# Altium PCB PCB1.PcbDoc
Units mm, origin at the board's own origin, x right, y up, seen from the top; angles counter-clockwise.
Board outline 105.02 x 130.7 mm, 2 copper layers (Top Layer, Bottom Layer); 102 components, 86 nets, 363 pads, 47 vias.
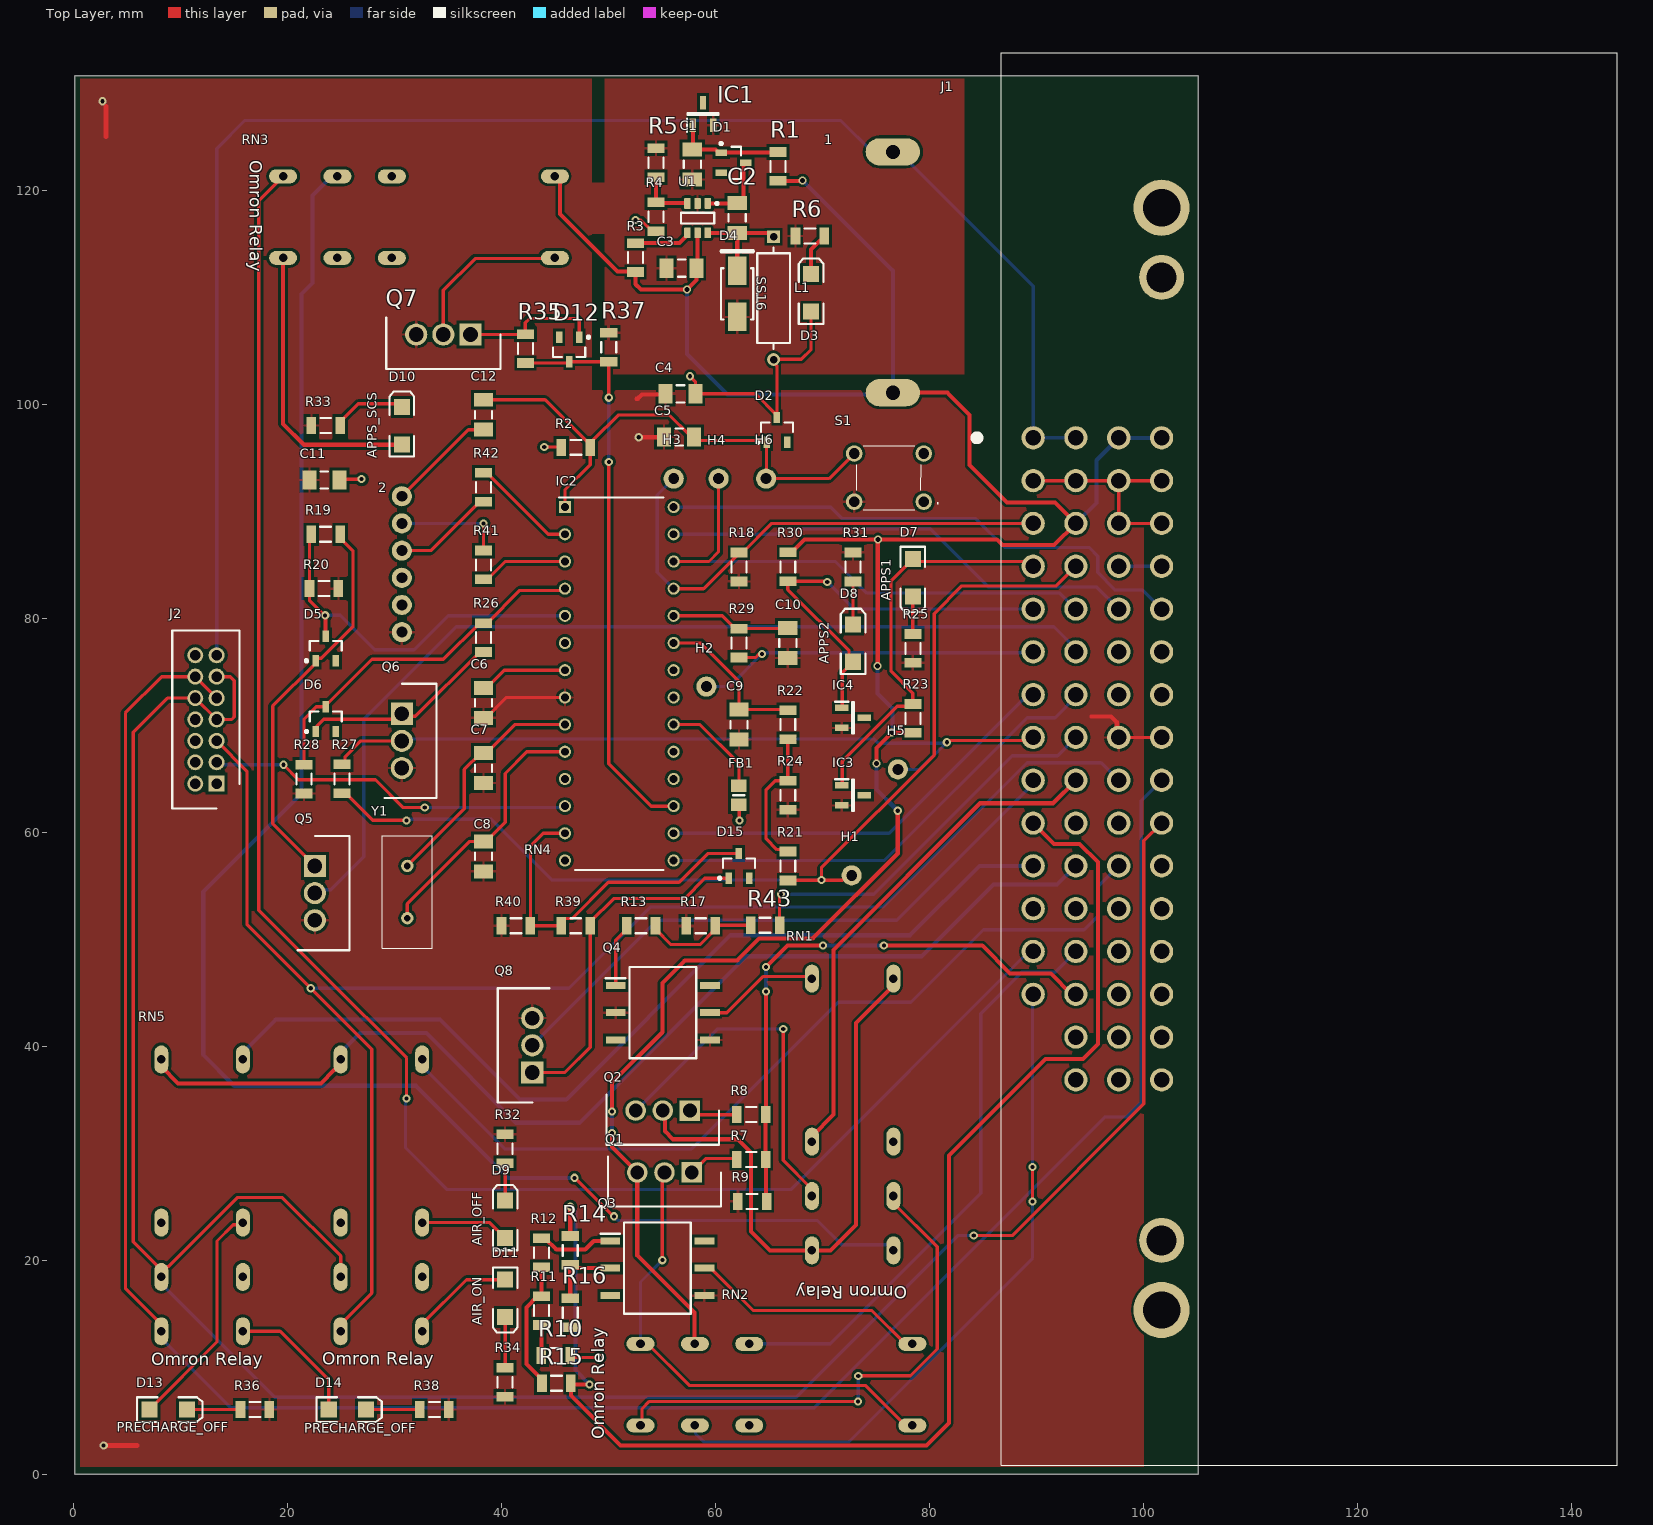
[diagram p0: Top Layer view]
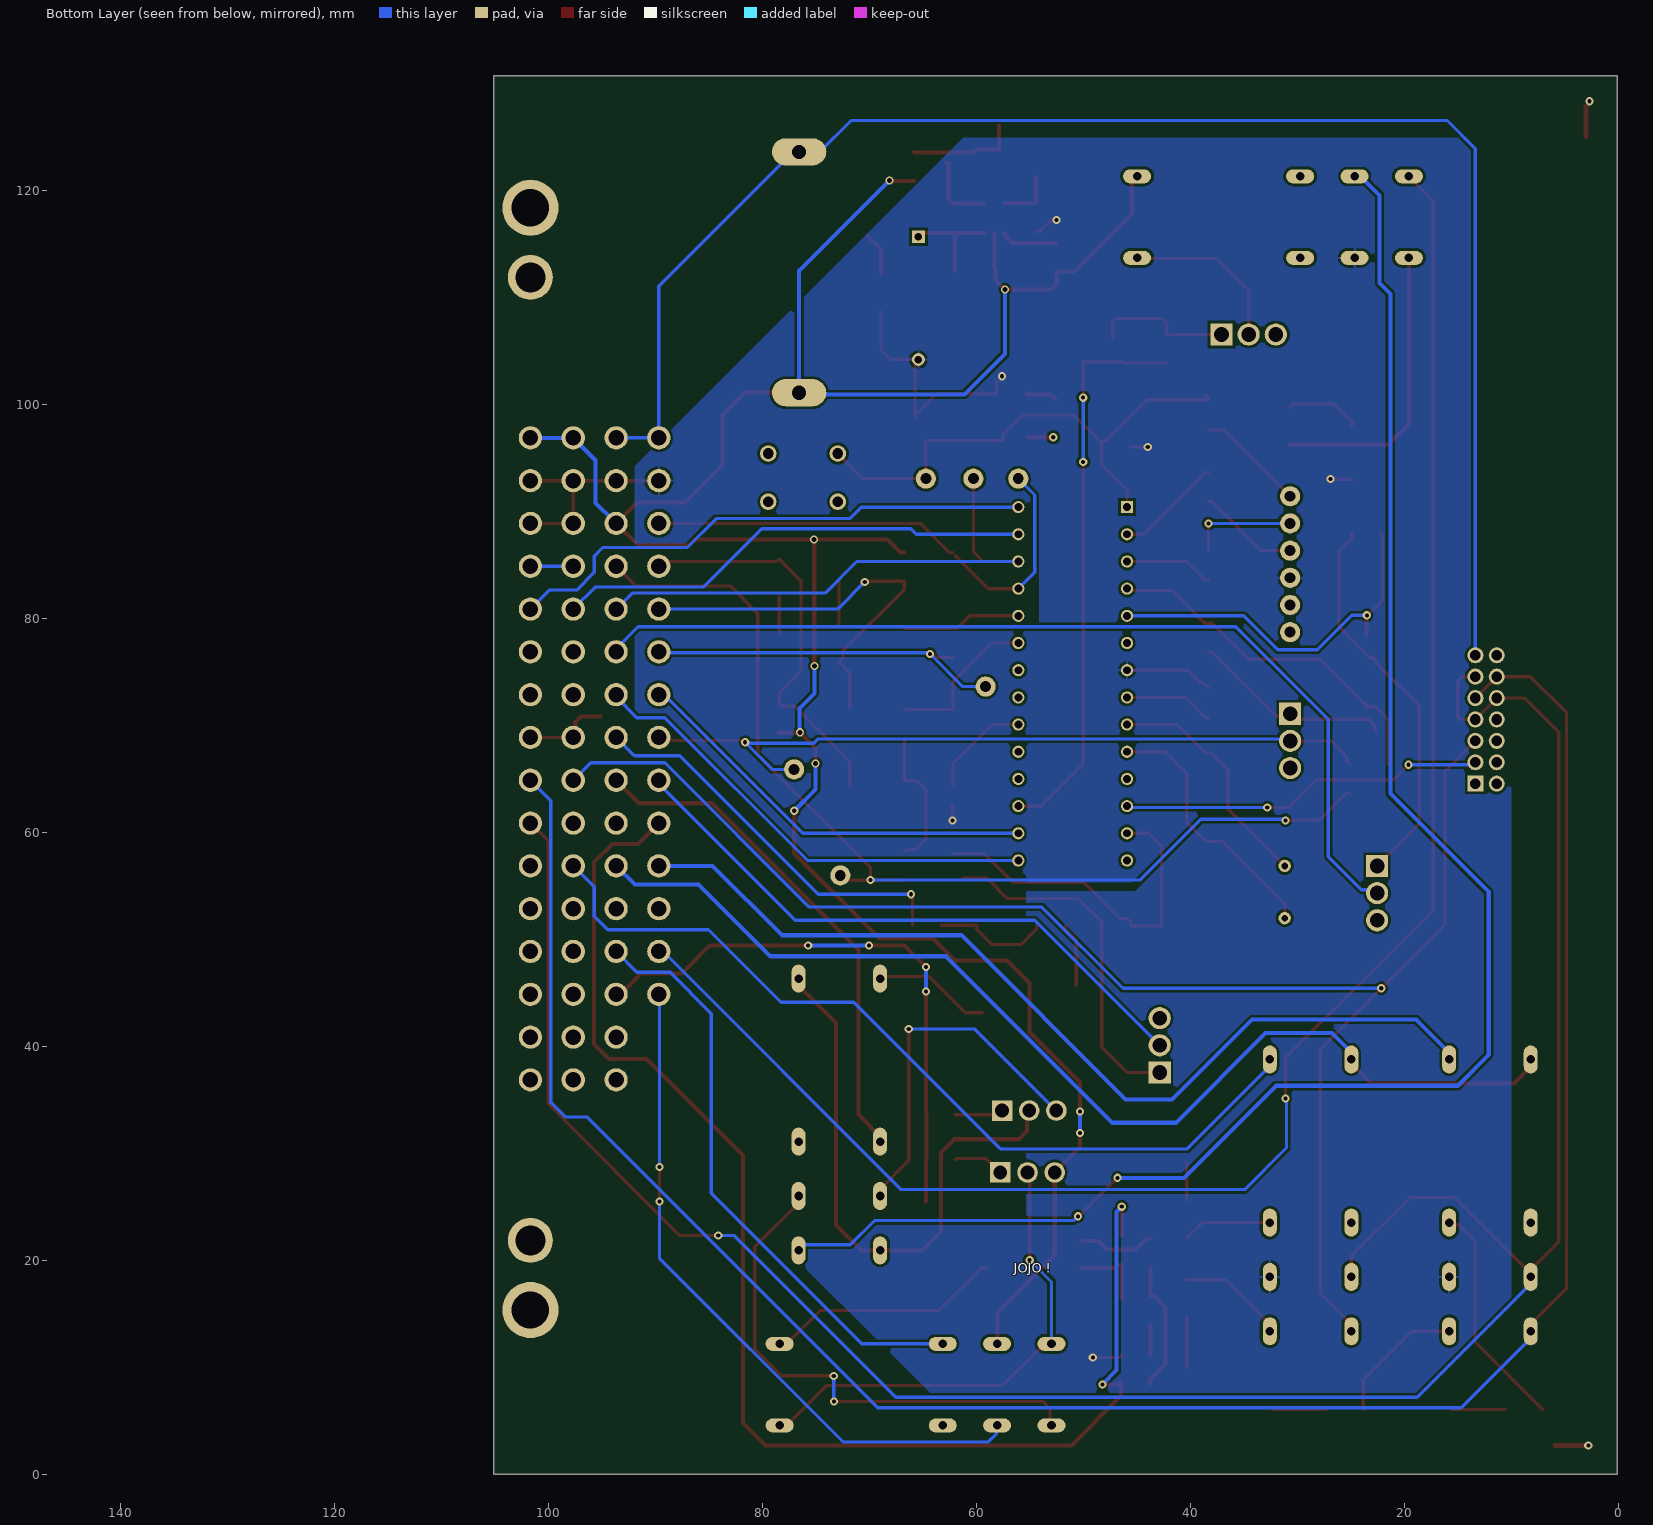
[diagram p1: Bottom Layer view, seen from below]

## Layer stack, top to bottom
Top Solder: solder mask 0.0102, Solder Resist, Dk 3.5
Top Layer: signal copper 0.0356
Dielectric 1: dielectric 0.32, FR-4, Dk 4.8
Bottom Layer: signal copper 0.0356
Bottom Solder: solder mask 0.0102, Solder Resist, Dk 3.5

## Board outline
0.078,0 0.078,130.7 105.1,130.7 105.1,0

## Design rules (kind name [scope] priority, off if disabled: settings)
Clearance [All] p1: gap=0.254 ignorepadtopadclearanceinfootprint=FALSE
Height [All] p1: minheight=0 maxheight=127 prefheight=36.777
HoleSize [All] p1: absolutevalues=TRUE maxlimit=3.81 minlimit=0.025 maxpercent=80.000 minpercent=20.000
MinimumSolderMaskSliver [All] p1: minsoldermaskwidth=0.025
PlaneClearance PlaneClearance_1 [All] p1: clearance=0.508
PlaneClearance [All] p2: clearance=100
PolygonConnect [All] p1: connectstyle=Relief reliefconductorwidth=0.254 reliefentries=4 polygonreliefangle="90 Angle" airgapwidth=0.254
RoutingVias [All] p1: holewidth=0.381 width=0.762 viastyle="Through Hole" minholewidth=0.381 minwidth=0.762 maxholewidth=0.381 maxwidth=0.762
SilkToSilkClearance [All] p1: silktosilkclearance=0
SilkToSolderMaskClearance [IsPad] p1: minsilkscreentomaskgap=0 clearancetoexposedcopper=TRUE
SolderMaskExpansion [All] p1: expansion=0.102 istentingtop=FALSE
UnRoutedNet [All] p1: checkbadconnections=TRUE
Width [All] p1: maxlimit=0.457 minlimit=0.254 preferedwidth=0.381 bottomlayer_maxwidth=0.457 minimp=50.000000 maximp=50.000000 favimp=50.000000
23 further rules are at their usual default settings.

## Classes and differential pairs
component class Sheet4: 2 C11 C12 H1 H2 H3 H4 H5 H6 J1 J2 R41 R42
component class Sheet3: D9 D10 D11 D12 D13 D14 D15 Q7 Q8 R32 R33 R34 R35 R36 R37 R38 R39 R40 RN3 RN4 RN5
component class Sheet2: C6 C7 C8 C9 C10 D5 D6 D7 D8 FB1 IC2 IC3 IC4 Q5 Q6 R18 R19 R20 R21 R22 R23 R24 R25 R26 R27 R28 R29 R30 R31 Y1
component class Sheet1: 1 C1 C2 C3 C4 C5 D1 D2 D3 D4 IC1 L1 Q1 Q2 Q3 Q4 R1 R2 R3 R4 R5 R6 R7 R8 R9 R10 R11 R12 R13 R14 R15 R16 R17 R43 RN1 RN2 S1 U1

## Components (designator, comment, footprint, x,y, rotation, side; value= is the part's Value field where it differs from the comment)
1 "fuse" fuse 76.542,112.724 r90 top
2 "FTDI_connector" FTDI 30.736,85.013 r270 top
C1 "100nF" KEMT-1206-2_N 57.8,122.4 r90 top
C2 "100nF" KEMT-1206-2_N 62,117.4 r90 top
C3 "100nF" KEMT-1206-2_N 56.8,112.7 r0 top
C4 "100nF" KEMT-1206-2_N 56.695,100.964 r0 top
C5 "100nF" KEMT-1206-2_N 56.568,96.936 r0 top
C6 "10uF" KEMT-1206-2_N 38.28,72.084 r90 top
C7 "22pF" KEMT-1206-2_N 38.28,65.988 r90 top
C8 "22pF" KEMT-1206-2_N 38.28,57.736 r90 top
C9 "10uF" KEMT-1206-2_N 62.156,70.052 r90 top
C10 "0.01uF" KEMT-1206-2_N 66.728,77.672 r90 top
C11 "0.01uF" KEMT-1206-2_N 23.424,92.912 r0 top
C12 "10uF" KEMT-1206-2_N 38.28,99.008 r90 top
D1 "BAT54" INF-SOT23_N 61.65,122.55 r0 top
D2 "BAT54" INF-SOT23_N 65.712,97.586 r90 top
D3 "APPS1" 3.2X1.6X1.1 68.9,110.4 r90 top
D4 "SS16" FAIR-SMA-2_B_V 62,110.3 r90 top
D5 "BAT54" INF-SOT23_N 23.548,77.164 r90 top
D6 "BAT54" INF-SOT23_N 23.548,70.56 r90 top
D7 "APPS1" 3.2X1.6X1.1 78.412,83.768 r270 top
D8 "APPS2" 3.2X1.6X1.1 72.824,77.672 r90 top
D9 "AIR_OFF" 3.2X1.6X1.1 40.312,23.824 r90 top
D10 "APPS_SCS" 3.2X1.6X1.1 30.66,97.992 r90 top
D11 "AIR_ON" 3.2X1.6X1.1 40.312,16.43 r270 top
D12 "BAT54" INF-SOT23_N 46.3,105.1 r270 top
D13 "PRECHARGE_OFF" 3.2X1.6X1.1 8.816,6.044 r0 top
D14 "PRECHARGE_OFF" 3.2X1.6X1.1 25.58,6.044 r0 top
D15 "BAT54" INF-SOT23_N 62.156,56.844 r90 top
FB1 "MPZ2012S221A" BEADC2012X105N 62.156,63.448 r90 top
H1 "Header" Header 72.691,55.958 r0 top
H2 "Header" Header 59.108,73.608 r0 top
H3 "Header" Header 56.06,93.039 r0 top
H4 "Header" Header 60.251,93.039 r0 top
H5 "Header" Header 77.009,65.864 r0 top
H6 "Header" Header 64.69,93.042 r0 top
IC1 "LM4040B82BZT" SOT95P237X112-3N 58.8,127.1 r90 top
IC2 "ATMEGA328-PU" DIP1016W53P254L3468H457Q28N 50.98,73.862 r0 top
IC3 "LM4040B82BZT" SOT95P237X112-3N 72.824,63.448 r0 top
IC4 "LM4040B82BZT" SOT95P237X112-3N 72.824,70.687 r0 top
J1 "1-1418362-3" 114183623 89.652,96.848 r270 top locked
J2 "87831-1420" SHDR14W55P200_2X7_1665X630X640P 13.356,64.528 r90 top
L1 "IR02BH100K" FP-IR02-MFG 65.4,109.9 r270 top value=10uH
Q1 "IRF4905PBF" TO254P469X1042X1967-3P 57.74,28.2 r180 top
Q2 "IRF4905PBF" TO254P469X1042X1967-3P 57.584,33.984 r180 top
Q3 "MCT2ESM" SOT254P916X480-6N 54.536,19.252 r0 top
Q4 "MCT2ESM" SOT254P916X480-6N 55.044,43.128 r0 top
Q5 "IRFZ44n" TO254P483X1016X2223-3P 22.532,56.844 r270 top
Q6 "IRFZ44n" TO254P483X1016X2223-3P 30.66,71.068 r270 top
Q7 "IRFZ44n" TO254P483X1016X2223-3P 37.08,106.5 r180 top
Q8 "IRFZ44n" TO254P483X1016X2223-3P 42.852,37.54 r90 top
R1 "4.7k" R1206 65.8,122.2 r270 top
R2 "4.7k" R1206 46.916,95.96 r180 top
R3 "4.7k" R1206 52.5,113.7 r90 top
R4 "4.7k" R1206 54.4,117.5 r270 top
R5 "4.7k" R1206 54.4,122.543 r270 top
R6 "4.7k" R1206 68.8,115.7 r0 top
R7 "CRCW120647K0FKEA" R1206 63.3,29.4 r180 top
R8 "CRCW120647K0FKEA" R1206 63.3,33.6 r180 top
R9 "CRCW120647K0FKEA" R1206 63.4,25.5 r0 top
R10 "CRCW120647K0FKEA" R1206 45.057,11.1 r0 top
R11 "CRCW120647K0FKEA" R1206 43.7,15.3 r90 top
R12 "CRCW120647K0FKEA" R1206 43.7,20.7 r90 top
R13 "CRCW120647K0FKEA" R1206 53.012,51.256 r180 top
R14 "CRCW120647K0FKEA" R1206 46.4,20.9 r270 top
R15 "CRCW120647K0FKEA" R1206 45.1,8.5 r180 top
R16 "CRCW120647K0FKEA" R1206 46.4,15.1 r90 top
R17 "CRCW120647K0FKEA" R1206 58.6,51.256 r0 top
R18 "CRCW120647K0FKEA" R1206 62.156,84.784 r90 top
R19 "CRCW120647K0FKEA" R1206 23.548,87.832 r0 top
R20 "CRCW120647K0FKEA" R1206 23.374,82.752 r180 top
R21 "CRCW120647K0FKEA" R1206 66.728,56.844 r90 top
R22 "CRCW120647K0FKEA" R1206 66.728,70.052 r90 top
R23 "CRCW120647K0FKEA" R1206 78.412,70.635 r90 top
R24 "CRCW120647K0FKEA" R1206 66.728,63.448 r90 top
R25 "CRCW120647K0FKEA" R1206 78.412,77.164 r270 top
R26 "CRCW120647K0FKEA" R1206 38.28,78.18 r270 top
R27 "CRCW120647K0FKEA" R1206 25.072,64.972 r270 top
R28 "CRCW120647K0FKEA" R1206 21.516,64.972 r90 top
R29 "CRCW120647K0FKEA" R1206 62.156,77.672 r90 top
R30 "CRCW120647K0FKEA" R1206 66.728,84.784 r270 top
R31 "CRCW120647K0FKEA" R1206 72.824,84.784 r90 top
R32 "CRCW120647K0FKEA" R1206 40.312,30.428 r90 top
R33 "CRCW120647K0FKEA" R1206 23.548,97.992 r180 top
R34 "CRCW120647K0FKEA" R1206 40.312,8.584 r270 top
R35 "CRCW120647K0FKEA" R1206 42.2,105.2 r90 top
R36 "CRCW120647K0FKEA" R1206 16.944,6.044 r0 top
R37 "CRCW120647K0FKEA" R1206 50,105.3 r270 top
R38 "CRCW120647K0FKEA" R1206 33.708,6.044 r0 top
R39 "CRCW120647K0FKEA" R1206 46.916,51.256 r0 top
R40 "CRCW120647K0FKEA" R1206 41.328,51.256 r0 top
R41 "CRCW120647K0FKEA" R1206 38.28,84.958 r270 top
R42 "CRCW120647K0FKEA" R1206 38.28,92.23 r90 top
R43 "CRCW120647K0FKEA" R1206 64.6,51.3 r180 top
RN1 "relay_driver" OMRON_12_RELAY 72.663,35.957 r0 top
RN2 "relay_driver" OMRON_12_RELAY 68,8.5 r270 top
RN3 "relay_driver" OMRON_12_RELAY 34.6,117.6 r270 top
RN4 "relay_driver" OMRON_12_RELAY 28.628,28.396 r0 top
RN5 "relay_driver" OMRON_12_RELAY 11.864,28.396 r0 top
S1 "FSM16JH" FSM16JH 79.428,90.88 r0 top
U1 "LM2734YMK/NOPB" DDC0006A_N 58.3,117.375 r270 top
Y1 "ECS-160-18-4X-CKM" ECS160184XCKM 31.168,56.844 r270 top

## Footprints (in the part's own frame and the unit in brackets; to place one, negate y for a bottom-side part, rotate by r counter-clockwise, add the part's x,y. Pads: shape width x height; smd on the part's side, far side on the other; paste and mask are expansions set on the pad)
3.2X1.6X1.1 [mm] "SMT LED; 2 Flat Leads"
  rect 1.5x1.5 smd: 1(-1.75,0) 2(1.75,0)
  silkscreen extent -2.9,-1.15 3.2,1.15
114183623 [mm]
  round 2.175 hole 1.45: 1(0,0) 2(0,4) 3(0,8) 4(0,12) 5(4,0) 6(4,8) 7(4,4) 8(4,12) 9(8,0) 10(8,4) 11(8,8) 12(8,12) 13(12,0) 14(12,4) 15(12,8) 16(12,12) 17(16,0) 18(16,4) 19(16,8) 20(16,12) 21(20,0) 22(20,4) 23(20,8) 24(20,12) 25(24,0) 26(24,4) 27(24,8) 28(24,12) 29(28,0) 30(28,4) 31(28,8) 32(28,12) 33(32,0) 34(32,4) 35(32,8) 36(32,12) 37(36,0) 38(36,4) 39(36,8) 40(36,12) 41(40,0) 42(40,4) 43(40,8) 44(40,12) 45(44,0) 46(44,4) 47(44,8) 48(44,12) 49(48,0) 50(48,4) 51(48,8) 52(48,12) 53(52,0) 54(52,4) 55(52,8) 56(52,12) 57(56,4) 58(56,8) 59(56,12) 60(60,4) 61(60,8) 62(60,12)
  round 4.2 hole 2.8: MH1(75,12) MH2(-15,12)
  round 5.25 hole 3.5: MH3(81.5,12) MH4(-21.5,12)
  silkscreen extent -36,-5.5 96,54.6, body extent -35.38,-1.91 96.62,55.69, height 36.76
BEADC2012X105N [mm]
  rect 1.15x1.45 smd: 1(-0.9,0) 2(0.9,0)
  silkscreen extent 0,-0.53 0,0.53, body extent -1,-0.63 1,0.63, height 1.05
DDC0006A_N [mm] "SOT23, 6-Leads, Body 3.05x1.75mm, Pitch 0.95mm, IPC Medium Density"
  rrect17% 1x0.6 smd: 1(-1.375,0.95) 2(-1.375,0) 3(-1.375,-0.95) 4(1.375,-0.95) 5(1.375,0) 6(1.375,0.95)
  silkscreen extent -1.5,-1.55 0.5,1.93, body extent -1.43,-1.48 1.43,1.49, height 0.9
DIP1016W53P254L3468H457Q28N [mm]
  rect 1.133x1.133 hole 0.733: 1(-5.08,16.51)
  round 1.133 hole 0.733: 2(-5.08,13.97) 3(-5.08,11.43) 4(-5.08,8.89) 5(-5.08,6.35) 6(-5.08,3.81) 7(-5.08,1.27) 8(-5.08,-1.27) 9(-5.08,-3.81) 10(-5.08,-6.35) 11(-5.08,-8.89) 12(-5.08,-11.43) 13(-5.08,-13.97) 14(-5.08,-16.51) 15(5.08,-16.51) 16(5.08,-13.97) 17(5.08,-11.43) 18(5.08,-8.89) 19(5.08,-6.35) 20(5.08,-3.81) 21(5.08,-1.27) 22(5.08,1.27) 23(5.08,3.81) 24(5.08,6.35) 25(5.08,8.89) 26(5.08,11.43) 27(5.08,13.97) 28(5.08,16.51)
  silkscreen extent -5.65,-17.4 4.13,17.4, body extent -5.21,-17.34 5.21,17.34, height 4.57
ECS160184XCKM [mm]
  round 1.155 hole 0.63: 1(0,0) 2(4.88,0)
  silkscreen extent -2.81,-2.32 7.69,2.32, body extent -2.81,-2.32 7.69,2.32, height 3.6
FAIR-SMA-2_B_V [mm] "Molded Diode, 2-Leads, Body 4.75x2.95mm"
  rect 2.65x1.75 smd: 1(-2.15,0) 2(2.15,0)
  silkscreen extent -2.4,-1.5 3.97,1.5, body extent -2.6,-1.48 2.6,1.48, height 2.7
FP-IR02-MFG [mm]
  rect 1.2x1.2 hole 0.7 paste-1000 mask+0: 1(-5.736,0)
  round 1.2 hole 0.7 paste-1000 mask+0: 2(5.736,0)
  silkscreen extent -4.74,-1.53 4.74,1.53, body extent -6.44,-1.63 6.44,1.63, height 0.25
FSM16JH [mm]
  round 1.54 hole 0.99: 1(0,0) 2(-6.5,0) 3(0,4.5) 4(-6.5,4.5)
  silkscreen extent -6.25,-0.74 1.35,5.25, body extent -6.89,-0.74 0.4,5.25, height 17.4
FTDI [mil]
  round 74 hole 40: 1(-251,-3) 2(-151,-3) 3(-51,-3) 4(49,-3) 5(149,-3) 6(249,-3)
fuse [mil]
  oval 100x200 hole 52: 1(427,0) 2(-459,0)
Header [mil]
  round 74 hole 40: 1(0.22,-0.11)
INF-SOT23_N [mm] "SOT23, 3-Leads, Body 2.9x1.3 mm, Pitch 0.95 mm, IPC Medium Density"
  rect 1.05x0.6 smd: 1(-1.15,0.95) 2(-1.15,-0.95) 3(1.15,0)
  silkscreen extent -1.27,-1.5 0.7,1.92, body extent -0.7,-1.5 0.7,1.5, height 1.1
KEMT-1206-2_N [mm] "SMD, 2-Leads, Body 3.4x1.8mm, IPC Medium Density"
  rect 1.3x1.8 smd: 1(-1.4,0) 2(1.4,0)
  silkscreen extent -0.35,-0.8 0.35,0.8, body extent -1.7,-0.9 1.7,0.9, height 0.88
OMRON_12_RELAY [mil]
  oval 51.5x103 hole 31.5: C1(-145,408) C2(155,408) NC1(-145,-192) NC2(155,-192) NO1(-145,-592) NO2(155,-592) POLE1(-145,-392) POLE2(155,-392)
R1206 [mm]
  rect 0.9x1.6 smd: 1(-1.357,0) 2(1.343,0)
  silkscreen extent -0.51,-0.7 0.49,0.7, body extent -1.66,-0.85 1.64,0.85, height 0.6
SHDR14W55P200_2X7_1665X630X640P [mm]
  rect 1.5x1.5 hole 1: 1(0,0)
  round 1.5 hole 1: 2(0,2) 3(2,0) 4(2,2) 5(4,0) 6(4,2) 7(6,0) 8(6,2) 9(8,0) 10(8,2) 11(10,0) 12(10,2) 13(12,0) 14(12,2)
  silkscreen extent -2.32,-2.15 14.33,4.15, body extent -2.32,-2.15 14.33,4.15, height 6.4
SOT95P237X112-3N [mm]
  rect 1.25x0.6 smd: 1(-1.05,0.95) 2(-1.05,-0.95) 3(1.05,0)
  silkscreen extent -1.68,-1.46 0.08,1.5, body extent -1.18,-1.46 1.18,1.46, height 1.12
SOT254P916X480-6N [mm]
  rect 1.85x0.65 smd: 1(-4.4,2.54) 2(-4.4,0) 3(-4.4,-2.54) 4(4.4,-2.54) 5(4.4,0) 6(4.4,2.54)
  silkscreen extent -5.33,-4.26 3.13,4.26, body extent -4.58,-4.26 4.58,4.26, height 4.8
TO254P469X1042X1967-3P [mm]
  rect 1.92x1.92 hole 1.28: 1(0,0)
  round 1.92 hole 1.28: 2(2.54,0) 3(5.08,0)
  silkscreen extent -2.73,-1.5 7.81,3.19, body extent -2.67,-1.5 7.75,3.19, height 18.84
TO254P483X1016X2223-3P [mm]
  rect 2.07x2.07 hole 1.38: 1(0,0)
  round 2.07 hole 1.38: 2(2.54,0) 3(5.08,0)
  silkscreen extent -2.8,-1.61 7.88,3.22, body extent -2.54,-1.61 7.62,3.22, height 21.4

## Part data
C1 C2 C3 C4 C5 C6 C7 C8 C9 C10 C11 C12: library part CMP-1037-04202-2, "CAP, Ceramic, 0.1 uF, +/- 10%, 50 V, -55 to 125 degC, 1206 (3216 Metric), RoHS, Tape and Reel", Capacitance=0.1µF, Capacitance Tolerance=±10%, Capacitor Case Style=1206[3216Metric], Dielectric Characteristic=X7R, Manufacturer=Kemet, Operating Temperature Max=125degC, Operating Temperature Min=-55degC, Package Description="2-Leads SMD, Body 3.2 x 1.6 mm", Package Reference=1206-2, Voltage Rating=50V, Datasheet URL=https://datasheet.ciiva.com/6125/1725438-6125494.pdf, Datasheet Version=Jul-13, Manufacturer URL=http://www.kemet.com/, Packaging=Tape&Reel, Product Range=KEMET-CSeries, SVHC=ToBeAdvised
D1 D2 D5 D6 D12 D15: library part CMP-1182-00010-1, "Silicon Schottky Diode, SOT23, Reel, Green", Manufacturer=Infineon, ComponentLink1Description="Manufacturer URL", ComponentLink1URL=http://www.infineon.com/, ComponentLink2Description=Datasheet, ComponentLink2URL=http://www.infineon.com/dgdl/bat54series.pdf?folderId=db3a30431400ef68011425f1ca2505e3&fileId=db3a304314dca3890115190b74210ea6, ComponentLink3Description="Package Specification", ComponentLink3URL=http://www.infineon.com/dgdl/SOT23-Package_Overview.pdf?folderId=db3a30431936bc4b0119532290053c66&fileId=db3a30431936bc4b0119533468123c85, Configuration=Single, CT (max)="10Â pF", Green=TRUE, IF (max)="200Â mA", Mounting Technology="Surface Mount", PackageDescription="3-Pin Small Outline Transistor Package, 1.3 x 2.9 mm Body, 0.95 mm Pitch", PackageReference=SOT23, PackageVersion=Apr-08, Packing=Reel, PartNumber=BAT54, VF (max)="800Â mV", VR (max)="30Â V"
D3 D7 D8 D9 D10 D11 D13 D14: library part LED2, "Typical RED, GREEN, YELLOW, AMBER GaAs LED", LatestRevisionDate=17-Jul-2002, LatestRevisionNote="Re-released for DXP Platform.", PackageDescription="SM LED; 2 Flat Leads", PackageReference=3.2X1.6X1.1, PackageVersion=Feb-2002, Published=8-Jun-2000, Publisher="Altium Limited"
D4: library part CMP-2000-07149-1, "Schottky Rectifier, 700 mV, -65 to 125 degC, 2-Pin SMA, RoHS, Tape and Reel", Manufacturer=FairchildSemiconductor, Operating Temperature=-65to125°C, Package=2DO-214AC, Package Description="2-Pin Surface Mount Device, Body 4.375 x 2.725 mm", Package Reference=SMA-2, Peak Average Forward Current=1@Ta=75CA, Peak Forward Voltage=0.7V, Peak Non-Repetitive Surge Current=40A, Peak Reverse Current=200uA, Peak Reverse Repetitive Voltage=60V, Category=Rectifier, Configuration=Single, Datasheet URL=http://www.mouser.com/ds/2/149/SS16-196707.pdf, Datasheet Version="Rev. 1.9, 01/2015", Manufacturer URL=https://www.fairchildsemi.com/, Mounting=SurfaceMount, Mounting Technology=SurfaceMount, Packaging=Tape&Reel, Type=SchottkyDiode
FB1: "Ferrite Bead", Manufacturer_Name=TDK, Mouser Part Number=810-MPZ2012S221A, Datasheet Link=https://product.tdk.com/info/en/catalog/datasheets/beads_commercial_power_mpz2012_en.pdf, Height=1.05mm, Manufacturer_Part_Number=MPZ2012S221A, Mouser Price/Stock=https://www.mouser.co.uk/ProductDetail/TDK/MPZ2012S221A?qs=g8DL0B6GkTmmIcDMLnw6hw%3D%3D
IC1 IC3 IC4: library part LM4040B25IDBZT, "Integrated Circuit", Manufacturer_Name="Texas Instruments", Mouser Part Number=595-LM4040B25IDBZT, Arrow Part Number=LM4040B25IDBZT, Arrow Price/Stock=https://www.arrow.com/en/products/lm4040b25idbzt/texas-instruments, Datasheet Link=https://www.ti.com/lit/gpn/LM4040, Height=1.12mm, Manufacturer_Part_Number=LM4040B25IDBZT, Mouser Price/Stock=https://www.mouser.com/Search/Refine.aspx?Keyword=595-LM4040B25IDBZT
IC2: "Integrated Circuit", Manufacturer_Name=Microchip, Mouser Part Number=556-ATMEGA328-PU, Arrow Part Number=ATMEGA328-PU, Arrow Price/Stock=https://www.arrow.com/en/products/atmega328-pu/microchip-technology, Datasheet Link=https://componentsearchengine.com/Datasheets/1/ATMEGA328-PU.pdf, Height=4.572mm, Manufacturer_Part_Number=ATMEGA328-PU, Mouser Price/Stock=https://www.mouser.co.uk/ProductDetail/Microchip-Technology-Atmel/ATMEGA328-PU?qs=lwdSMh1%2FoYJT8tfItQpQtA%3D%3D
J1: "Connector", Manufacturer_Name="TE Connectivity", Mouser Part Number=571-1-1418362-3, Arrow Part Number=1-1418362-3, Arrow Price/Stock=https://www.arrow.com/en/products/1-1418362-3/te-connectivity, Datasheet Link=https://www.arrow.com/en/products/1-1418362-3/te-connectivity, Height=48mm, Manufacturer_Part_Number=1-1418362-3, Mouser Price/Stock=https://www.mouser.co.uk/ProductDetail/TE-Connectivity-AMP/1-1418362-3?qs=J7fCQMU5Gej7aVw8AejcvQ%3D%3D
J2: "Connector", Manufacturer_Name=Molex, Mouser Part Number=538-87831-1420, Datasheet Link=http://docs-emea.rs-online.com/webdocs/150d/0900766b8150deae.pdf, Height=6.4mm, Manufacturer_Part_Number=87831-1420, Mouser Price/Stock=https://www.mouser.co.uk/ProductDetail/Molex/87831-1420/?qs=QtQX4uD3c2VDCL534TqpVg%3D%3D
L1: library part CMP-03630-000001-1, "IR-2 10 10% B08", Inductance=10uH, Manufacturer="Vishay Dale", Package=IR02, Saturation Current=130mA, Self Resonant Frequency=50MHz, Series Resistance=3.7Ω, Temperature="-55°C to +105°C", Temperature Range High=+105°C, Temperature Range Low=-55°C, Test Frequency=7.9MHz, Tolerance=10%, Automotive=No, Category=Ind, ComponentLink2Description=Datasheet, ComponentLink2URL=https://datasheet.ciiva.com/8536/ir-8536517.pdf, Core Material=Iron, Device Class L1="Passive Components", Device Class L2=Inductors, Device Class L3="Fixed Inductors", Digikey Description="IR-2 10 10% B08", Height=3.05mm, Ipc Land Pattern Name=CAPAD1147W70L838D305, Lead Free=Yes, Manufacturer Part Number=IR02BH100K, Mouser Description="Fixed Inductors 10uH 10%", Obsolete Part=true, Octopart=https://octopart.com/ir02bh100k-vishay+dale-39675774, Q Factor=55, RoHS=TRUE
Q1 Q2: "MOSFET (P-Channel)", Manufacturer_Name=Infineon, Mouser Part Number=942-IRF4905PBF, Arrow Part Number=IRF4905PBF, Arrow Price/Stock=https://www.arrow.com/en/products/irf4905pbf/infineon-technologies-ag, Datasheet Link=http://docs-emea.rs-online.com/webdocs/0791/0900766b807910f2.pdf, Height=4.69mm, Manufacturer_Part_Number=IRF4905PBF, Mouser Price/Stock=https://www.mouser.co.uk/ProductDetail/Infineon-IR/IRF4905PBF/?qs=9%252BKlkBgLFf39l0HsWdxvdw%3D%3D
Q3 Q4: "Phototransistor", Manufacturer_Name="ON Semiconductor", Mouser Part Number=512-MCT2ESM, Arrow Part Number=MCT2ESM, Arrow Price/Stock=https://www.arrow.com/en/products/mct2esm/on-semiconductor, Datasheet Link=https://www.onsemi.com/pub/Collateral/MCT2EM-D.PDF, Height=4.8mm, Manufacturer_Part_Number=MCT2ESM, Mouser Price/Stock=https://www.mouser.co.uk/ProductDetail/ON-Semiconductor-Fairchild/MCT2ESM/?qs=nW0pe8qlIZjLnc6UyUzYTw%3D%3D
Q5 Q6 Q7 Q8: "Transistor", Manufacturer_Name=Infineon, Datasheet Link=http://www.irf.com/product-info/datasheets/data/irfz44n.pdf, Height=4.83mm, Manufacturer_Part_Number=IRFZ44n
R1 R2 R3 R4 R5 R6: library part RES, Manufacturer="Vishay Dale", Part Number=CRCW120647K0FKEA
R7 R8 R9 R10 R11 R12 R13 R14 R15 R16 R18 R19 R20 R21 R22 R23 R24 R26 R27 R28 R29 R30 R31 R32 R33 R34 R35 R36 R37 R38 R39 R40 R41 R42 R43: library part RES, Manufacturer="Vishay Dale", Part Number=CRCW120647K0FKEA
R17 R25: library part CMP-2003-02213-1, Manufacturer="Vishay Dale", Part Number=CRCW120647K0FKEA
S1: "Switch", Manufacturer_Name="TE Connectivity", Mouser Part Number=506-FSM16JH, Arrow Part Number=FSM16JH, Arrow Price/Stock=https://www.arrow.com/en/products/fsm16jh/te-connectivity, Datasheet Link=https://www.te.com/commerce/DocumentDelivery/DDEController?Action=showdoc&DocId=Customer+Drawing%7F1825910%7FC10%7Fpdf%7FEnglish%7FENG_CD_1825910_C10.pdf%7F3-1825910-1, Height=17.3mm, Manufacturer_Part_Number=FSM16JH, Mouser Price/Stock=https://www.mouser.co.uk/ProductDetail/TE-Connectivity-PB/FSM16JH/?qs=eA0sQYb2Mifk48vugSh4aw%3D%3D
U1: library part CMP-0069-01201-3, "1A Load Step-Down DC-DC Regulator, 6-pin Tiny SOT23, Pb-Free", Manufacturer="Texas Instruments", PackageTopMarking=SFEB*XTT, PowerWise=N, Code_IPC=SOT26A-6, Code_JEDEC=MO-193-AA, ComponentLink1Description="Datasheet URL", ComponentLink1URL=http://www.ti.com/general/docs/lit/getliterature.tsp?genericPartNumber=LM2734&fileType=pdf, CompType=Switcher, PackageDescription="Molded TSOT, 2.97 x 1.65 x 0.87mm Body, 6 Lead, 0.95mm Pitch", PackageReference=DDC0006A, PinCount=6, RoHS=Y
Y1: "Crystal or Oscillator", Manufacturer_Name=ECS, Mouser Part Number=520-ECS160-18-4X-CKM, Datasheet Link=https://www.mouser.be/datasheet/2/122/hc-49usx-791.pdf, Height=3.5mm, Manufacturer_Part_Number=ECS-160-18-4X-CKM, Mouser Price/Stock=https://www.mouser.co.uk/ProductDetail/ECS/ECS-160-18-4X-CKM?qs=7MVldsJ5UawYqyimirccKw%3D%3D

## Via types
v1: diameter 0.762, hole 0.381, Top Layer to Bottom Layer, 40 vias
v2: diameter 0.762, hole 0.457, Top Layer to Bottom Layer, 7 vias

## Nets (pads, with @x,y where several pads share a name; then routed paths per layer and width w, separated by ;. In a path a pad name is that pad's centre, name@x,y a point inside that pad or via, vN(x,y) a via of type N, cw(c..) or ccw(c..) an arc to the next point about the centre after c; other vN are vias at no path point)
+5V: 2.4 C4.2 C6.2 C11.2 D2.3 D3.1 FB1.1 IC2.7 J1.5 J1.6 J1.7 J1.8 J1.11 J1.12 L1.2 R2.2 R4.2 R10.2 RN3.POLE2 RN4.POLE2 RN5.POLE2 | length 62
  Top Layer w0.305: C11.2 24.9,92.988 v1(26.901,92.988) ; C6.2 38.778,73.982 39.06,73.982 40.21,75.132 IC2.7 ; v1(43.97,95.985) 45.541,95.985 R2.2@45.566,95.96 ; R10.2 46.6,10.9 v1(49.1,10.9) ; v1(52.5,117.2) 53.007,117.2 54.05,116.157 R4.2 ; v1(57.6,102.6) 58.095,102.105 C4.2 63.71,100.964 D2.3@65.712,98.961 ; v1(62.2,61.1) 62.2,62.504 FB1.1 FB1.1@62.306,62.548 ; D2.3 D2.3@65.712,98.961 ; D3.1 68.9,105.1 68,104.2 65.436,104.2 L1.2 65.4,103.909 65.712,103.597 D2.3@65.712,98.961 ; J1.5 J1.7 J1.6 ; J1.12 J1.11 J1.6 ; J1.8 J1.6
+15V: 1.2 C3.2 J1.3 J1.4 J1.10 Q1.3 R1.2 R3.1 R23.1 R30.1 RN2.POLE1 RN3.C1 U1.5 | length 244.1
  Top Layer w0.381: RN3.C1 44.998,121.283 45.427,120.855 45.427,117.773 50.8,112.4 52.443,112.4 R3.1 52.5,111.2 53,110.7 v2(57.3,110.7) 58.2,111.6 C3.2 58.3,112.8 U1.5 ; v1(50.3,31.9) 50.3,30.56 Q1.3 52.66,20.44 58,15.1 58,12.226 RN2.POLE1 ; v1(50.3,33.9) 50.3,36.6 55,41.3 55,45.9 57.1,48 62,48 64.056,50.056 69.056,50.056 77,58 v2(77,62) ; R1.2 68.057,120.857 v2(68.1,120.9) ; R30.1@66.728,86.134 67.078,86.134 68.299,87.355 v2(75.155,87.355) ; v2(75,66.4) 75,67.856 v2(76.472,69.328) 76.515,69.285 R23.1@78.412,69.285 ; v2(75.11,75.513) 75.132,75.536 75.132,87.332 v2(75.155,87.355) ; 1.2 81.635,101.065 81.8,100.9 83.7,99 83.7,94.3 87.2,90.8 91.7,90.8 J1.10 91.62,86.816 86.794,86.816 86.255,87.355 v2(75.155,87.355) ; J1.4@101.524,96.976 J1.4
  Bottom Layer w0.381: v1(50.3,31.9) v1(50.3,33.9) ; v2(57.3,110.7) 57.3,104.7 61.1,100.9 76.377,100.9 1.2 76.542,112.458 v2(68.1,120.9) ; v2(75,66.4) 75,64 v2(77,62) ; v2(75.11,75.513) 75.11,72.973 76.507,71.576 76.507,69.363 v2(76.472,69.328) ; J1.10 93.906,88.848 93.906,89.102 95.557,90.753 95.557,94.753 J1.3 J1.4
GND: 2.6 C1.1 C3.1 C4.1 C5.1 C6.1 C7.1 C8.1 C9.1 C10.1 C11.1 D4.1 IC1.2 IC2.8 IC3.2 IC4.2 J1.31 J1.32 Q3.4 Q4.2 Q4.4 Q5.3 Q6.3 Q7.3 Q8.3 R5.1 R6.1 R9.1 R16.1 R17.1 R18.1 R20.1 R24.1 R25.2 R28.1 R31.2 R32.2 R33.2 R34.2 R36.2 R37.1 R38.2 R40.1 S1.2 U1.2 | length 27.7
  Top Layer w0.305: C6.1 38.53,70.684 40.438,72.592 IC2.8 ; J1.31 J1.32
  Top Layer w0.381: 52.6,100.5 52.703,100.5 53.103,100.9 55.231,100.9 C4.1 ; v1(52.8,96.9) 55.132,96.9 C5.1 ; 95.125,70.814 96.934,70.814 97.464,70.284 97.464,69.036 J1.31
  Top Layer w0.457: v1(2.8,2.7) 5.9,2.7 ; 3,125 3,127.8
  other v1: 2.7,128.3
Net1_1: 1.1 J1.1 J1.2 J2.13 | length 149.3
  Bottom Layer w0.305: J2.13 13.356,123.868 15.988,126.5 71.672,126.5 74.602,123.57 75.872,123.57 77.091,123.57 89.652,111.009 J1.1 J1.2
Net2_1: 2.1 C12.1 | length 10.2
  Top Layer w0.305: 2.1 36.88,97.608 C12.1
Net2_2: 2.2 R41.1 | length 10.2
  Top Layer w0.305: R41.1@38.28,86.308 v1(38.28,88.848)
  Bottom Layer w0.305: 2.2 v1(38.28,88.848)
Net2_3: 2.3 R42.1 | length 9.5
  Top Layer w0.305: 2.3 33.358,86.308 37.93,90.88 R42.1@38.28,90.88
NetC1_2: C1.2 D1.1 IC1.1 R1.1 | length 10.4
  Top Layer w0.381: IC1.1 57.85,123.85 C1.2 59.975,123.8 60.275,123.5 D1.1 60.529,123.529 65.771,123.529 R1.1
NetC2_1: C2.1 D4.2 L1.1 U1.6 | length 9.9
  Top Layer w0.381: U1.6 C2.1 ; D4.2 C2.1 ; L1.1 65.036,116 C2.1
NetC2_2: C2.2 D1.3 U1.1 | length 7.1
  Top Layer w0.381: U1.1 62.2,118.75 62.6,119.15 62.6,122.441 62.709,122.55 D1.3
NetC5_2: C5.2 C12.2 D2.1 H6.1 IC2.1 R2.1 S1.4 | length 50.5
  Top Layer w0.305: C12.2@38.565,100.885 38.28,100.6 C12.2 44.043,100.408 47.881,96.57 48.19,96.57 R2.1@48.258,96.502 ; IC2.1 45.9,91.972 48.266,94.338 48.266,95.96 48.266,96.366 48.322,96.366 48.564,96.608 48.564,96.664 50.877,98.977 55.674,98.977 57.5,97.151 57.5,96.603 64.652,96.603 64.762,96.494 D2.1 ; H6.1 H6.1@64.732,93.039 ; D2.1@64.762,96.18 64.732,96.149 H6.1@64.732,93.039 ; S1.4 70.587,93.039 H6.1@64.732,93.039
NetC7_2: C7.2 IC2.9 Y1.1 | length 22.4
  Top Layer w0.305: Y1.1 36.5,62.176 36.5,65.858 38.03,67.388 38.53,67.388 41.194,70.052 IC2.9
NetC8_2: C8.2 IC2.10 Y1.2 | length 24.6
  Top Layer w0.305: Y1.2 31.168,53.288 37.016,59.136 C8.2 38.53,59.136 40.312,60.918 40.312,65.48 42.344,67.512 IC2.10
NetC9_2: C9.2 IC2.23 R22.2 | length 14.8
  Top Layer w0.305: IC2.23 58.6,77.672 62.156,74.116 C9.2 66.678,71.452 R22.2@66.728,71.402
NetC10_2: C10.2 IC2.24 R29.2 | length 11.2
  Top Layer w0.305: IC2.24 60.616,80.212 61.806,79.022 62.156,79.022 66.678,79.022 C10.2
NetD3_2: D3.2 R6.2 | length 4.1
  Top Layer w0.381: D3.2 68.9,114.457 R6.2
NetD5_1: D5.1 Q5.1 R19.2 | length 36.4
  Top Layer w0.305: Q5.1 18.6,60.776 18.6,71.791 22.598,75.789 D5.1 22.598,76.065 22.771,76.238 23.13,76.238 26.088,79.196 26.088,86.292 24.898,87.482 R19.2@24.898,87.832
NetD5_3: D5.3 IC2.5 R19.1 R20.2 | length 36.8
  Top Layer w0.305: R20.2@22.024,82.752 22.024,87.658 R19.1@22.198,87.832 ; R20.2@22.025,82.751 22.025,81.673 23.548,80.15 23.548,78.741 D5.3 ; D5.3@23.497,78.741 v1(23.497,80.263)
  Bottom Layer w0.305: v1(23.497,80.263) 24.894,80.263 28.12,77.037 31.803,77.037 34.978,80.212 IC2.5
NetD6_1: D6.1 Q6.1 R26.2 | length 19.2
  Top Layer w0.305: D6.1 22.746,69.558 22.746,69.946 23.36,70.56 30.152,70.56 Q6.1 30.901,70.827 31.927,70.827 37.93,76.83 R26.2@38.28,76.83
NetD6_3: D6.3 IC2.4 R26.1 R28.2 | length 33.8
  Top Layer w0.305: R28.2@21.516,66.322 21.516,70.56 22.666,71.71 D6.3 23.548,71.935 23.696,72.083 23.808,72.083 27.873,76.148 34.548,76.148 37.93,79.53 38.28,79.53 38.63,79.53 41.69,82.59 45.738,82.59 IC2.4
NetD7_1: D7.1 IC3.1 J1.13 R23.2 | length 37.8
  Top Layer w0.305: IC3.1 71.808,64.432 71.808,66.623 76.952,71.767 78.195,71.767 78.412,71.985 78.412,72.988 76.38,75.02 76.38,83.486 D7.1 78.638,85.292 88.688,85.292 89.132,84.848 J1.13
NetD7_2: D7.2 R25.1 | length 3.5
  Top Layer w0.305: R25.1@78.412,78.514 D7.2
NetD8_1: D8.1 IC4.1 J1.17 R30.2 | length 38.7
  Top Layer w0.305: v1(70.411,83.387) 70.364,83.434 67.078,83.434 67.062,83.434 66.728,83.434 66.728,82.672 72.449,76.951 72.449,76.297 D8.1 71.808,74.906 IC4.1@71.808,71.637
  Bottom Layer w0.305: v1(70.411,83.387) 72.95,80.848 J1.17
NetD8_2: D8.2 R31.1 | length 4
  Top Layer w0.305: D8.2 R31.1@72.824,83.434
NetD9_1: D9.1 RN4.NC2 | length 8.3
  Top Layer w0.305: RN4.NC2 38.867,23.519 D9.1
NetD9_2: D9.2 R32.1 | length 3.5
  Top Layer w0.305: D9.2 R32.1@40.312,29.078
NetD10_1: D10.1 RN3.NO2 | length 27.4
  Top Layer w0.381: RN3.NO2 19.563,98.137 21.5,96.2 30.618,96.2 D10.1
NetD10_2: D10.2 R33.1 | length 6.9
  Top Layer w0.305: R33.1@24.898,97.992 24.898,98.342 26.58,100.024 30.378,100.024 D10.2
NetD11_1: D11.1 RN4.NO2 | length 10.1
  Top Layer w0.305: RN4.NO2 32.565,14.045 36.7,18.18 D11.1
NetD11_2: D11.2 R34.1 | length 4.7
  Top Layer w0.305: R34.1@40.312,9.934 D11.2
NetD12_1: D12.1 Q7.1 R35.2 | length 13
  Top Layer w0.305: Q7.1 42.157,106.5 R35.2 42.2,107.6 42.6,108 47,108 47.25,107.75 D12.1
NetD12_3: D12.3 IC2.17 R35.1 R37.2 | length 53.1
  Top Layer w0.305: R35.1 46.193,103.843 D12.3 49.993,103.95 R37.2 v1(50,100.6) ; v1(50,94.6) 50,66.4 53.968,62.432 IC2.17
  Bottom Layer w0.305: v1(50,94.6) v1(50,100.6)
NetD13_1: D13.1 RN5.NC2 | length 21.5
  Top Layer w0.305: D13.1 13.388,12.366 13.388,21.792 14.912,23.316 15.598,23.316 RN5.NC2
NetD13_2: D13.2 R36.1 | length 5
  Top Layer w0.025: R36.1 R36.1@15.594,6.044
  Top Layer w0.254: D13.2 R36.1
NetD14_1: D14.1 RN5.NO2 | length 12.7
  Top Layer w0.305: RN5.NO2 19.281,13.359 23.83,8.81 D14.1
NetD14_2: D14.2 R38.1 | length 5
  Top Layer w0.305: D14.2 R38.1@32.358,6.044
NetD15_1: D15.1 Q8.1 R39.2 | length 32.7
  Top Layer w0.305: Q8.1 45.9,37.54 48.266,39.906 48.266,51.256 48.266,51.606 50.456,53.796 57.076,53.796 58.974,55.694 D15.1
NetD15_3: D15.3 IC2.13 R39.1 R40.2 | length 33.6
  Top Layer w0.305: IC2.13 43.868,59.892 42.678,58.702 42.678,51.256 45.566,51.256 45.566,51.606 45.889,51.929 46.573,51.929 49.964,55.32 56.568,55.32 59.242,57.994 D15.3
NetFB1_2: FB1.2 IC2.20 | length 9.7
  Top Layer w0.305: IC2.20 58.524,70.052 62.156,66.42 FB1.2
NetH1_1: H1.1 J1.14 R21.1 R27.2 | length 98.8
  Top Layer w0.305: R27.2@25.072,63.622 25.422,63.622 27.944,61.1 v1(31.1,61.1) ; R21.1@66.728,55.494 66.75,55.516 69.845,55.516 v1(69.867,55.538) 69.867,56.667 80.4,67.2 80.4,80.422 82.984,83.006 91.81,83.006 J1.14 ; v1@69.823,55.494 71.83,55.494 72.291,55.955 H1.1
  Bottom Layer w0.305: v1(31.1,61.1) 31.2,61.2 39.004,61.2 44.666,55.538 v1(69.867,55.538)
NetH2_1: H2.1 J1.21 R29.1 | length 34.4
  Top Layer w0.305: R29.1@62.156,76.322 63.74,76.322 64.074,76.656 v1(64.315,76.656)
  Bottom Layer w0.305: H2.1 61.264,73.605 v1(64.315,76.656) 64.411,76.752 89.11,76.752 89.333,76.529 J1.21
NetH3_1: H3.1 IC2.25 J1.9 R18.2 | length 47.3
  Top Layer w0.305: IC2.25 58.854,82.752 R18.2@61.947,85.845 ; R18.2@62.156,86.134 62.506,86.134 65.22,88.848 J1.9
  Bottom Layer w0.305: IC2.25 54.536,84.276 54.536,91.507 H3.1
NetH4_1: H4.1 IC2.26 J1.18 | length 50.8
  Top Layer w0.305: IC2.26 59.362,85.292 60.251,86.181 60.251,93.031 H4.1
  Bottom Layer w0.305: IC2.26 71.173,85.292 74.123,82.342 92.158,82.342 J1.18
NetH5_1: H5.1 J1.29 Q6.2 R27.1 | length 72.1
  Top Layer w0.305: R27.1@25.072,66.322 25.351,66.601 25.351,67.051 26.828,68.528 Q6.2 ; v1(81.587,68.401) 81.757,68.571 89.375,68.571 J1.29
  Bottom Layer w0.305: Q6.2 30.832,68.7 74.793,68.7 75.193,68.3 76.289,68.3 81.486,68.3 v1(81.587,68.401) 81.508,68.322 79.047,65.861 H5.1 ; J1.29@89.492,68.688 J1.29
NetIC2_2: IC2.2 R42.2 | length 10
  Top Layer w0.305: R42.2@38.28,93.58 38.63,93.58 38.953,93.257 38.953,93.224 44.345,87.832 IC2.2
NetIC2_3: IC2.3 R41.2 | length 8.3
  Top Layer w0.305: R41.2@38.28,83.608 38.63,83.608 40.314,85.292 IC2.3
NetIC2_12: IC2.12 J2.3 | length 34.3
  Top Layer w0.305: v1(19.6,66.3) 21,64.9 28.2,64.9 30.8,62.3 v1(32.8,62.3)
  Bottom Layer w0.305: J2.3 13.584,66.3 v1(19.6,66.3) ; v1(32.8,62.3) 45.768,62.3 IC2.12
NetIC2_15: IC2.15 J1.26 | length 44.1
  Bottom Layer w0.305: IC2.15 75.752,57.352 89.1,70.7 91.7,70.7 93.652,72.652 J1.26
NetIC2_16: IC2.16 J1.25 | length 39
  Bottom Layer w0.305: IC2.16 76.192,59.892 89.148,72.848 J1.25
NetIC2_27: IC2.27 J1.19 | length 45
  Bottom Layer w0.305: IC2.27 65.614,87.832 66.133,88.351 80.052,88.351 85.502,82.901 95.599,82.901 97.589,80.911 97.652,80.911 J1.19
NetIC2_28: IC2.28 J1.20 | length 50.4
  Bottom Layer w0.305: IC2.28 70.728,90.372 71.8,89.3 84.31,89.3 87.01,86.6 94.884,86.6 95.684,85.8 95.684,84.276 97.335,82.625 99.875,82.625 J1.20
NetJ1_15: J1.15 J1.16 | length 4
  Bottom Layer w0.305: J1.15 J1.16
NetJ1_22: J1.22 Q5.2 | length 90.1
  Bottom Layer w0.305: Q5.2 22.855,54.627 24.027,54.627 27.1,57.7 27.1,70.556 35.744,79.2 91.6,79.2 93.652,77.148 J1.22
NetJ1_30: J1.30 R43.1 | length 36.6
  Top Layer w0.305: R43.1 65.957,53.934 66.1,54.076 v1(66.1,54.2)
  Bottom Layer w0.305: v1(66.1,54.2) 74.752,54.2 87.683,67.131 91.935,67.131 J1.30
NetJ1_33: J1.33 Q8.2 | length 57.2
  Bottom Layer w0.305: Q8.2 54.536,51.764 76.888,51.764 89.652,64.528 J1.33
NetJ1_34: J1.34 RN1.NC1 | length 48
  Top Layer w0.381: RN1.NC1 68.98,31.58 71,33.6 71,49 84.7,62.7 91.504,62.7 J1.34
NetJ1_35: J1.35 J2.5 RN4.NO1 | length 147.3
  Top Layer w0.305: J2.5 16.182,65.702 16.182,51.383 v1(22.151,45.414) 27.859,39.706 27.859,16.927 24.945,14.013 RN4.NO1
  Bottom Layer w0.305: v1(22.151,45.414) 46.281,45.414 53.867,53 75.584,53 89.08,66.496 96.004,66.496 J1.35
NetJ1_36: J1.36 J2.9 J2.12 RN5.NO1 | length 207.6
  Top Layer w0.305: RN5.NO1 8.181,14.013 4.828,17.366 4.828,71.144 8.212,74.528 J2.12 J2.9
  Bottom Layer w0.305: RN5.NO1 8.181,12.705 14.686,6.2 69.2,6.2 96.39,33.39 98.39,33.39 99.748,34.748 99.748,62.944 J1.36
NetJ1_37: J1.37 R14.1 R15.1 | length 128.9
  Top Layer w0.381: R14.1 v1(46.4,25) ; v1(48.2,8.4) 46.557,8.4 R15.1 46.457,7.343 51.1,2.7 79.7,2.7 81.774,4.775 81.774,29.775 90.8,38.8 94.3,38.8 95.7,40.2 95.7,57.2 94,58.9 91.6,58.9 J1.37
  Bottom Layer w0.381: v1(46.4,25) 46.874,24.526 46.874,9.726 v1(48.2,8.4)
NetJ1_40: J1.40 J2.7 J2.10 J2.11 RN4.POLE1 RN5.POLE1 | length 227.9
  Top Layer w0.305: RN5.POLE1 RN5.POLE1@8.181,18.808 ; J2.11 14.627,74.528 15,74.155 15,70.775 14.753,70.528 J2.7 J2.10 8.752,72.528 5.559,69.335 5.559,21.716 8.181,19.093 RN5.POLE1@8.181,18.808 ; RN4.POLE1 24.945,20.395 19.484,25.856 15.28,25.856 8.827,19.403 8.776,19.403 RN5.POLE1@8.181,18.808 ; v1(84.1,22.3) 87.7,22.3 100,34.6 100,59.196 J1.40
  Bottom Layer w0.305: RN5.POLE1 8.181,17.785 18.766,7.2 67.5,7.2 82.6,22.3 v1(84.1,22.3)
NetJ1_41: J1.41 RN5.C2 | length 87.9
  Bottom Layer w0.381: RN5.C2 15.801,39.413 18.881,42.493 34.216,42.493 41.709,35 46.027,35 61.394,50.367 78.158,50.367 84.639,56.848 J1.41
NetJ1_42: J1.42 RN4.C1 RN5.C1 | length 102.8
  Top Layer w0.381: RN5.C1 8.181,38.105 9.762,36.524 23.094,36.524 24.325,37.754 24.343,37.754 24.945,38.356 RN4.C1
  Bottom Layer w0.381: RN4.C1 24.945,39.413 26.755,41.223 32.946,41.223 41.328,32.841 47.241,32.841 62.8,48.4 79.239,48.4 85.93,55.091 91.895,55.091 J1.42
NetJ1_43: J1.43 RN4.C2 | length 81.5
  Bottom Layer w0.305: RN4.C2 32.565,38.105 40.27,30.4 57.734,30.4 71.434,44.1 78.241,44.1 85.016,50.875 94.414,50.875 95.684,52.145 95.684,54.88 J1.43
NetJ1_49: J1.49 RN3.NO1 | length 167
  Top Layer w0.305: RN3.NO1 17.3,119.02 17.3,52.7 23.4,46.6 31.1,38.9 v1(31.1,35.1)
  Bottom Layer w0.305: v1(31.1,35.1) 31,35 31,30.5 34.9,26.6 67,26.6 89.248,48.848 J1.49
NetJ1_50: J1.50 RN2.NC1 | length 55.6
  Bottom Layer w0.305: RN2.NC1 70.683,12.183 84.75,26.25 84.75,43.05 88.6,46.9 91.704,46.9 J1.50
NetJ1_53: J1.53 RN2.POLE2 | length 64.4
  Top Layer w0.305: v1(89.6,28.7) 89.6,25.5 v1(89.607,25.493)
  Bottom Layer w0.305: RN2.POLE2 58.1,4.506 58.1,3.8 58.9,3 72.4,3 89.6,20.2 89.6,25.486 v1(89.607,25.493) ; v1(89.6,28.7) 89.6,44.796 J1.53
NetJ1_54: J1.54 R7.1 R8.1 R9.2 | length 53.6
  Top Layer w0.381: v1(64.7,45.1) 64.7,33.643 R8.1 R7.1 64.7,29.357 64.7,25.543 R9.2 ; v1(64.7,47.4) 66.7,49.4 v1(70,49.4) ; v1(75.7,49.4) 84.9,49.4 87.5,46.8 91.3,46.8 93.252,44.848 J1.54
  Bottom Layer w0.381: v1(64.7,45.1) v1(64.7,47.4) ; v1(70,49.4) v1(75.7,49.4)
NetQ1_1: Q1.1 R7.2 | length 4.8
  Top Layer w0.305: Q1.1 59.04,29.5 61.857,29.5 R7.2
NetQ1_2: Q1.2 RN2.C2 RN2.NO1 | length 45.5
  Top Layer w0.305: RN2.NO1 53.617,12.183 57.5,8.3 73.972,8.3 77.709,4.563 RN2.C2 ; v1(55,20) 55,28 Q1.2
  Bottom Layer w0.305: RN2.NO1 52.963,17.963 v1(55,20)
NetQ2_1: Q2.1 R8.2 | length 4.5
  Top Layer w0.305: Q2.1 57.968,33.6 R8.2
NetQ2_2: Q2.2 RN1.C2 RN1.NO1 | length 54.3
  Top Layer w0.381: Q2.2 55.247,33.781 55.247,32.053 56,31.3 62.07,31.3 63.3,30.07 63.3,22.7 65.08,20.92 RN1.NO1 70.72,20.92 73.1,23.3 73.1,42.166 76.6,45.666 RN1.C2
NetQ2_3: Q2.3 RN1.POLE1 | length 33.7
  Top Layer w0.305: v1(66.3,41.6) 66.3,29.334 68.98,26.654 RN1.POLE1
  Bottom Layer w0.305: Q2.3 60.12,41.6 v1(66.3,41.6)
NetQ3_1: Q3.1 R12.2 | length 7.2
  Top Layer w0.381: R12.2 44.05,22.043 45.093,21 47.8,21 48.592,21.792 Q3.1
NetQ3_2: Q3.2 R14.2 R16.2 | length 7
  Top Layer w0.381: R16.2 R14.2 46.75,19.557 47.055,19.252 Q3.2
NetQ3_5: Q3.5 RN2.C1 | length 22.4
  Top Layer w0.305: Q3.5 59.536,19.252 63.488,15.3 74.592,15.3 77.709,12.183 RN2.C1
NetQ4_1: Q4.1 R13.2 | length 6
  Top Layer w0.305: Q4.1 50.644,49.888 51.662,50.906 R13.2@51.662,51.256
NetQ4_5: Q4.5 RN1.C1 | length 11
  Top Layer w0.305: Q4.5 61.028,43.128 64.4,46.5 68.8,46.5 RN1.C1
NetQ7_2: Q7.2 RN3.C2 | length 15.8
  Top Layer w0.305: Q7.2 34.54,110.64 37.5,113.6 44.9,113.6 RN3.C2
NetR3_2: R3.2 U1.4 | length 5.4
  Top Layer w0.381: R3.2 56.593,115.043 57.35,115.8 U1.4
NetR4_1: R4.1 R5.2 U1.3 | length 5.3
  Top Layer w0.381: R5.2 R4.1 54.454,118.804 57.296,118.804 U1.3
NetR10_1: R10.1 R11.1 | length 2.8
  Top Layer w0.381: R10.1 R11.1
NetR11_2: R11.2 R12.1 R15.2 | length 12.2
  Top Layer w0.381: R12.1 R11.2 43.35,16.643 42.3,15.593 42.3,10.307 43.757,8.85 R15.2
NetR13_1: R13.1 R17.2 R43.2 | length 10.8
  Top Layer w0.305: R13.1 54.369,50.906 55.775,49.5 58.537,49.5 59.943,50.906 R17.2 59.987,51.3 R43.2
NetR21_2: R21.2 R22.1 R24.2 | length 13.4
  Top Layer w0.305: R21.2@66.728,58.194 66.554,58.368 65.712,58.368 64.696,59.384 64.696,63.956 65.538,64.798 66.728,64.798 R22.1@66.728,68.702
NetRN1_NO2: RN1.NO2 RN3.POLE1 | length 159.7
  Top Layer w0.305: v1(46.8,27.7) 50.4,24.1 v1(50.5,24.1)
  Bottom Layer w0.305: v1(50.5,24.1) 50.503,24.1 50.903,23.7 69.5,23.7 71.753,21.447 76.113,21.447 76.6,20.96 RN1.NO2
  Bottom Layer w0.381: RN3.POLE1 24.083,121.283 22.3,119.5 22.3,111.3 21.3,110.3 21.3,63.6 12.1,54.4 12.1,39.2 15,36.3 32,36.3 40.6,27.7 v1(46.8,27.7)
NetRN1_POLE2: RN1.POLE2 RN2.NO2 | length 48.9
  Top Layer w0.305: RN2.NO2 53.1,4.7 53.1,6.1 53.8,6.8 v1(73.3,6.8) ; v1(73.307,9.193) 78.193,9.193 80.7,11.7 80.7,21.246 76.6,25.346 RN1.POLE2
  Bottom Layer w0.305: v1(73.3,6.8) 73.3,9.186 v1(73.307,9.193)
pads on no net: 2.5 D1.2 D2.2 D5.2 D6.2 D12.2 D15.2 IC1.3 IC2.6 IC2.11 IC2.14 IC2.18 IC2.19 IC2.21 IC2.22 IC3.3 IC4.3 J1.23 J1.24 J1.27 J1.28 J1.38 J1.39 J1.44 J1.45 J1.46 J1.47 J1.48 J1.51 J1.52 J1.55 J1.56 J1.57 J1.58 J1.59 J1.60 J1.61 J1.62 J1.MH1 J1.MH2 J1.MH3 J1.MH4 J2.1 J2.2 J2.4 J2.6 J2.8 J2.14 Q3.3 Q3.6 Q4.3 Q4.6 RN1.NC2 RN2.NC2 RN3.NC1 RN3.NC2 RN4.NC1 RN5.NC1 S1.1 S1.3

## Polygon pours and split planes (outlines as drawn)
GND on Top Layer "NONET_L-01_P-001" (solid, remove dead copper, pour order 14): 0.6,130.4 48.4,130.4 48.4,101.3 100,101.3 100,0.7 0.6,0.7
GND on Top Layer "GND_L01_P016" (solid, pour order 16): 49.6,130.4 83.2,130.4 83.2,102.8 49.6,102.8
GND on Top Layer "NONET_L-01_P-001" (solid, pour order 15): 48.2,120.7 49.6,120.7 49.6,115.9 48.2,115.9
+5V on Bottom Layer "NONET_L-01_P-001" (solid, remove dead copper, pour order 10): 91.9,94.2 61.2,124.9 10,124.9 10,6.6 63.3,6.6 91.9,35.2 91.9,36.439
+5V on Bottom Layer "NONET_L-01_P-001" (solid, pour order 11): 89.478,71.114 89.826,71.114 89.891,71.179 89.891,71.526 89.413,71.526

## Other copper
Bottom Layer:
  pour cut-out: 55.338,55.938 55.3,55.8 55.3,24.2 91.9,24.2 91.9,70.44 91.802,70.538 91.791,70.527 89.334,70.527 75.745,56.938 56.338,56.938
  pour cut-out: 54.1,79.4 54.1,87 91.805,87 91.805,79.413 91.717,79.325 91.641,79.4

## Silkscreen, mask and mechanical layers (free items; w line width, h text height)
Top Overlay:
Bottom Overlay:
  text "JOJO !" at 56.503,18.516 h1.52
Mechanical 1:
  the board outline again, w1.194

## Text inside footprints (layer, text, board x,y; h text height)
2: Mechanical 3 "6" at 33.708,79.069 h1.21 r180; Mechanical 3 "5" at 33.708,81.609 h1.21 r180; Mechanical 3 "4" at 33.708,84.149 h1.21 r180; Mechanical 3 "3" at 33.784,87.045 h1.21 r180; Mechanical 3 "1" at 33.708,91.769 h1.21 r180
H1: Mechanical 3 "1" at 72.107,58.117 h1.21 r270
H2: Mechanical 3 "1" at 58.524,75.767 h1.21 r270
H3: Mechanical 3 "1" at 55.476,95.198 h1.21 r270
H4: Mechanical 3 "1" at 59.667,95.198 h1.21 r270
H5: Mechanical 3 "1" at 76.425,68.023 h1.21 r270
H6: Mechanical 3 "1" at 64.106,95.201 h1.21 r270
RN1: Top Overlay "Omron Relay" at 77.9,17.97 h1.97 r180
RN2: Top Overlay "Omron Relay" at 50.013,3.263 h1.97 r90
RN3: Top Overlay "Omron Relay" at 16.033,122.782 h1.97 r270
RN4: Top Overlay "Omron Relay" at 23.218,9.803 h1.97
RN5: Top Overlay "Omron Relay" at 7.241,9.752 h1.97